# Altium PCB ver1.PcbDoc (part 2 of 2)
Units mil, origin at the board's own origin, x right, y up, seen from the top; angles counter-clockwise.
Board outline 3990 x 2445 mil, 4 copper layers (Top Layer, Top Inner, Bottom Inner, Bottom Layer), stack 53.912 mil thick; 100 components, 79 nets, 453 pads, 152 vias.
Unrouted connection lines stored in the file: 12.
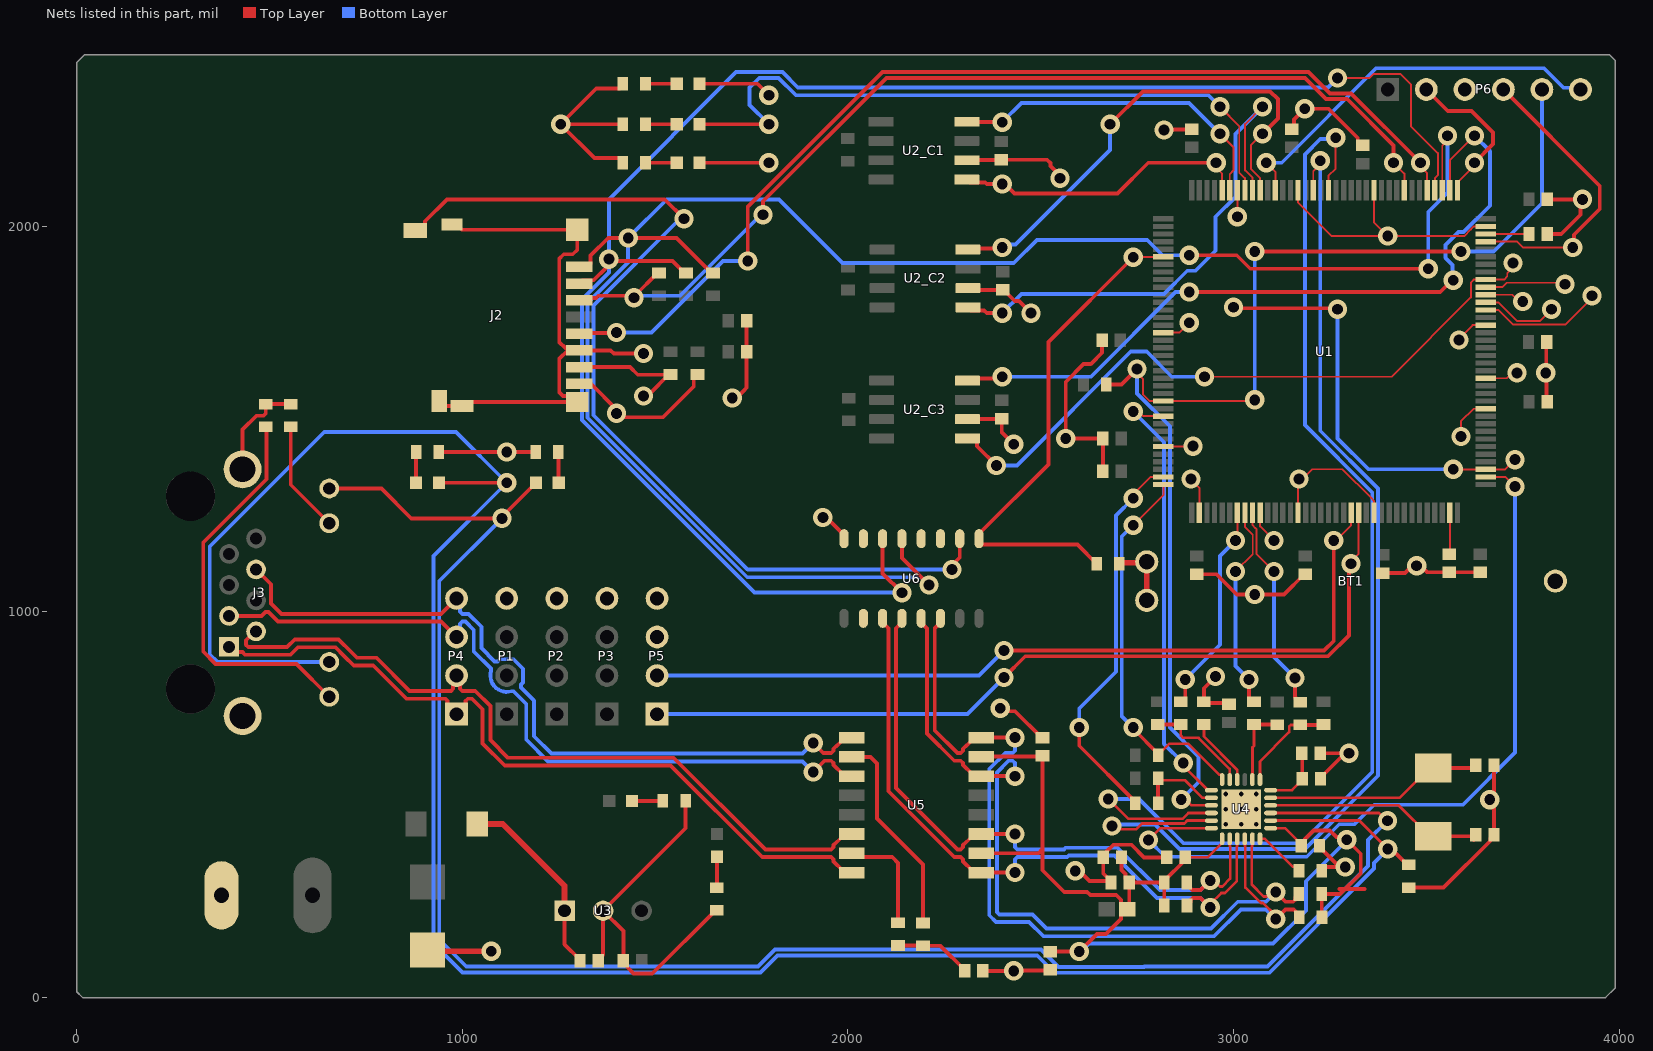
[diagram p4: the nets of this part, all layers, seen from the top]

## Via types
v1: diameter 50, hole 28, Top Layer to Bottom Layer, 143 vias
v2: diameter 23.62, hole 11.81, Top Layer to Bottom Layer, 9 vias

## Nets (pads, with @x,y where several pads share a name; then routed paths per layer and width w, separated by ;. In a path a pad name is that pad's centre, name@x,y a point inside that pad or via, vN(x,y) a via of type N, cw(c..) or ccw(c..) an arc to the next point about the centre after c; other vN are vias at no path point) (continued)
GND: BT1.2 C1.2 C2.2 C3.2 C4.2 C5.2 C6.2 C7.2 C8.2 C9.2 C10.2 C11.2 C12.2 C13.2 C14.2 C15.2 C16_C1.2 C16_C2.2 C16_C3.2 C17.2 C19.2 C20.2 C21.2 C22.2 C23.2 C24.2 C25.2 C30.2 C31.2 C32.2 C33.2 C34.2 C35.2 C36.2 C37.2 CR1.2 J1.2 J2.6 J2.10 J2.11 J2.12 J2.13 J2.14 J3.S1 J3.S2 P1.4 P2.4 P3.4 P6.3 R1.1 R2.1 R3.1 R4.1 R5.1 R6.1 R7.1 R21.2 R24.2 R31.2 R33.1 R34.1 U1.16 U1.31 U1.38 U1.51 U1.61 U1.83 U1.94 U1.107 U1.120 U1.130 U1.138 U2_C1.2 U2_C2.2 U2_C3.2 U3.2 U4.25 U6.8 | length 9668.8
  Top Layer w5: U1.31@2818.07,1428.94 2893.94,1428.94 v1(2895,1430) ; U1.16@2818.07,1724.21 2859.21,1724.21 v1(2885,1750) ; v1(2890,1345) 2890,1343.28 2911.57,1321.7 U1.38@2911.57,1256.69 ; v1(3010,2025) U1.138@3010,2093.31 ; U1.51@3167.48,1256.69 3167.48,1342.48 v1(3170,1345) 3179.28,1345 3204.28,1370 3282.48,1370 3356.71,1295.77 3364.33,1288.15 U1.61@3364.33,1256.69 ; U1.130@3167.48,2093.31 3167.78,2093.01 3167.78,2061.55 3254.33,1975 v1(3400,1975) ; U1.120@3364.33,2093.31 3364.33,2010.67 v1(3400,1975) ; v1(3585,1705) 3585,1708.88 3620.01,1743.9 U1.94@3654.69,1743.9 ; v1(3590,1455) 3590,1494.13 3622.93,1527.07 3654.39,1527.07 U1.83@3654.69,1527.36 ; U1.107@3654.69,1999.8 3623.23,1999.8 3615.61,1992.19 3615.61,1992.01 3598.6,1975 v1(3400,1975)
  Top Layer w7: C20.2@3223.15,390.47 C20.2@3223.15,393.42 ; R24.2@3229.06,328.42 R24.2@3239.06,338.42 ; v1@3280.67,338.42 v1(3290,338.42)
  Top Layer w10: J3.S1@430.04,1369.88 430.04,1472.75 466.07,1508.78 484.14,1508.78 490,1514.64 R33.1@490,1539.06 R34.1@555,1539.06 R34.1@558.94,1539.06 ; CR1.2@910,122.83 CR1.2@912.83,120 ; R7.1@939.06,1415 v1(1115,1415) R6.1@1190,1415 ; J2.10@939.88,1547.36 939.88,1546.75 952.07,1534.57 J2.12@998.94,1534.57 1012.72,1534.57 1022.56,1544.41 J2.13@1277.34,1544.41 ; J2.11@973.35,2005.04 985.16,2005.04 998.94,1991.26 J2.14@1298.15,1991.26 1298.15,1939.23 1286.45,1927.53 1262.82,1927.53 1251.12,1915.83 1251.12,1700.55 1267.12,1684.55 J2.6@1276.12,1684.55 ; J2.13@1298.15,1544.41 J2.13@1277.34,1544.41 ; C17.2@1352.24,95 1352.24,97.95 1365,110.71 U3.2@1365,225 ; R5.1@1415.94,2165 1415.94,2168.94 1407.17,2177.72 1342.28,2177.72 v1(1255,2265) ; R4.1@1415.94,2265 v1(1255,2265) ; R3.1@1415.94,2370 1415.94,2366.06 1407.17,2357.28 1347.28,2357.28 v1(1255,2265) ; v1(1470,1670) 1392.92,1670 1384.65,1678.27 J2.6@1303.07,1678.27 1273.4,1678.27 1251.12,1655.99 1251.12,1570.63 1261.37,1560.37 1276.12,1560.37 1277.34,1559.16 J2.13@1277.34,1544.41 ; R1.1@1579.06,510 1579.06,439.06 U3.2@1365,225 ; R2.1@1656.06,225.94 1492.4,62.28 1444.02,62.28 1427.52,78.79 1427.52,85.24 C19.2@1417.76,95 1417.76,172.24 U3.2@1365,225 ; v1(1700,1555) 1710.82,1555 1730.15,1574.32 1737.24,1581.4 C36.2@1737.24,1675 C37.2@1737.24,1755 ; v1(1935,1245) 1944.11,1245 1990,1199.11 U6.8@1990,1190 ; U2_C1.2@2309.72,2171.34 2310.41,2172.03 2396.59,2172.03 C16_C1.2@2397.28,2172.72 2516.46,2172.72 2525.27,2163.91 2525.27,2156.84 2550,2132.1 v1(2550,2125) ; U2_C3.2@2310,1500 2310.69,1500.69 2398.09,1500.69 C16_C3.2@2398.78,1501.38 2398.78,1466.22 v1(2430,1435) ; U2_C2.2@2315,1835 2401.02,1835 C16_C2.2@2401.28,1835.26 2404.23,1835.26 2432.71,1806.78 2443.22,1806.78 v1(2475,1775) ; C33.2@2349.84,69.06 v1(2429.84,69.06) 2431.22,70.43 2523.46,70.43 C22.2@2524.84,71.81 ; v1(2395,750) 2402.65,742.35 2433.6,742.35 2501.89,674.06 C25.2@2504.84,674.06 ; v1(2589.53,328.42) 2600.36,328.42 2626.34,302.44 2678.27,302.44 C24.2@2682.29,298.42 ; C11.2@2656.38,1360 C11.2@2661.38,1365 C2.2@2661.38,1450 v1(2565,1450) 2565,1596.76 2611.34,1643.11 2629.96,1643.11 2659.13,1672.28 C1.2@2659.13,1705 C1.2@2659.13,1707.95 ; C24.2@2672.52,311.14 2662.29,321.37 C23.2@2662.29,363.42 2672.05,373.19 2672.05,379.64 2688.55,396.14 2735.25,396.14 2767.96,363.42 C21.2@2827.29,363.42 ; v1(2820,2250) 2821.12,2251.12 2890.26,2251.12 C10.2@2891.38,2252.24 ; C3.2@2905,1097.76 2955.68,1097.76 2976.51,1076.92 3008.43,1045 3130.67,1045 3183.43,1097.76 C4.2@3186.38,1097.76 ; v1(2953.27,832.5) 2953.27,831.97 2923.27,801.97 R21.2@2923.27,766.97 2926.46,763.78 2985.08,763.78 C30.2@2988.27,760.59 ; C9.2@3151.38,2252.24 3156.72,2257.58 3156.72,2276.72 v1(3185,2305) 3246.57,2305 3322.28,2229.29 3322.28,2219.76 3332.05,2210 C13.2@3335,2210 ; C20.2@3223.15,390.47 v1@3275.2,338.42 ; C31.2@3224.53,633.42 v1@3289.02,633.42 ; C32.2@3225.52,566.97 3225.52,569.92 v1@3289.02,633.42 ; R24.2@3239.06,338.42 v1@3275.2,338.42 ; 3275,281.42 3340.16,281.42 ; v1@3280.2,333.42 v1@3275.2,338.42 ; v1@3280.67,338.42 v1@3275.2,338.42 ; v1(3299.53,633.42) v1@3289.02,633.42 ; C5.2@3387.01,1100.75 3444.92,1100.75 3464.18,1120 3485.82,1120 3503.07,1102.76 C14.2@3560,1102.76 C6.2@3640,1102.76 C6.2@3639.94,1102.69 ; R31.2@3455,285 3545,285 3665.75,405.75 3665.75,412.2 C35.2@3675.52,421.97 3675.27,422.21 3675.27,491.86 3664.76,502.37 v1(3664.76,513.19) ; v1@3664.53,513.42 3664.53,524.25 3675.52,535.23 C34.2@3675.52,601.97 ; C12.2@3812.24,1700 3811.12,1698.88 3811.12,1621.12 v1(3810,1620) 3811.81,1618.19 3811.81,1546.81 C7.2@3813.62,1545 ; C15.2@3813.62,1980 3850,1980 3900,2030 3900,2065 v1(3905,2070) C8.2@3813.62,2070
  Top Layer w15: CR1.2@912.83,120 v1(1075,120)
  other v1: 3055,1045 3475,1120
  other v2: 2980.16,449.05 3019.53,449.05 3058.9,449.05 2980.16,488.42 3019.53,488.42 3058.9,488.42 2980.16,527.79 3019.53,527.79 3058.9,527.79
NetBT1_1: BT1.1 R8.2 | length 173
  Top Layer w15: R8.2@2704.06,1125 2706.56,1127.5 2772.5,1127.5 BT1.1@2775,1130 BT1.1@2775,1030
NetC14_1: C14.1 U1.71 | length 113.2
  Top Layer w5: U1.71@3561.18,1256.69 3561.18,1143.82 C14.1@3561.38,1143.62
NetC15_1: C15.1 U1.106 | length 111.7
  Top Layer w5: U1.106@3654.69,1980.12 3654.8,1980 C15.1@3766.38,1980
NetC17_1: C17.1 D8.1 U3.1 | length 504.2
  Top Layer w10: U3.1@1265,225 1265,137.95 C17.1@1305,97.95
  Top Layer w15: D8.1@1038.66,450 1105,450 1265,290 U3.1@1265,225 ; C17.1@1305,95 C17.1@1305,97.95
NetC20_1: C20.1 C21.1 C22.1 C23.1 C24.1 C25.1 FB1.2 R27.1 R28.1 R29.1 R30.1 U4.1 U4.19 U5.2 U5.7 | length 3078.4
  Top Layer w7: C21.1@2874.53,363.42 2932.92,363.42 2970.32,400.82 U4.19@2970.32,411.65 ; U4.1@3096.3,439.21 3133.07,439.21 3175.91,396.37 C20.1@3175.91,393.42
  Top Layer w10: U5.2@2328.27,374.06 U5.2@2346.18,374.06 2494.06,374.06 2504.84,384.84 ; U5.7@2328.27,624.06 U5.7@2346.18,624.06 2347.56,625.43 2503.46,625.43 C25.1@2504.84,626.81 2504.84,384.84 ; C22.1@2524.84,119.06 v1(2599.84,119.06) 2645.81,165.03 2669.75,165.03 2708.07,203.35 2708.07,214.56 FB1.2@2721.93,228.42 ; C23.1@2709.53,363.42 2709.53,330.71 2719.77,320.47 2719.77,308.19 C24.1@2729.53,298.42 ; R27.1@2820.48,238.42 2820.24,238.66 R28.1@2820.24,302.6 ; C21.1@2874.53,363.42 2864.77,353.66 2864.77,346.77 2829.14,311.14 2828.78,311.14 R28.1@2820.24,302.6 ; C20.1@3175.91,396.37 3175.91,401.46 3180.99,401.46 3185.67,406.14 3185.67,411.22 3207.87,433.42 3249.53,433.42 3266.88,416.08 3286.88,416.08 3294.53,408.42 3330,372.95 3330,321.85 3276.57,268.42 R29.1@3228.59,268.42 3229.06,267.95 3229.06,208.89 R30.1@3229.53,208.42 ; 2504.84,384.84 2505,384.68 2505,330 2560.94,274.06 2620.47,274.06 2628.82,265.71 2695.86,265.71 2708.07,253.5 2708.07,242.28 FB1.2@2721.93,228.42 ; FB1.2@2721.93,228.42 FB1.2@2724.53,228.42 2729.53,233.42 C24.1@2729.53,298.42 ; C24.1@2729.53,298.42 R28.1@2820,298.42 2820,302.36 R28.1@2820.24,302.6
  Bottom Layer w10: v1(2599.84,119.06) 2604.75,119.06 2625.7,140 3102.68,140 3187.65,224.97 3187.65,301.54 3293.75,407.64 v1(3293.75,409.21)
NetC31_1: C31.1 C32.1 U4.6 | length 162.3
  Top Layer w7: U4.6@3096.3,537.63 3151.89,537.63 3178.27,564.01 C32.1@3178.27,566.97
  Top Layer w10: C32.1@3178.27,566.97 C31.1@3178.27,633.42
NetC33_1: C33.1 R25.2 R26.2 | length 201.8
  Top Layer w10: R26.2@2129.84,135 2130.31,134.53 2194.37,134.53 R25.2@2194.84,134.06 2240.55,134.06 2302.6,72.01 C33.1@2302.6,69.06
NetC34_1: C34.1 U4.5 X1.1 | length 564.7
  Top Layer w7: U4.5@3096.3,517.95 3430.83,517.95 3508.43,595.55 X1.1@3518.27,595.55 ; C34.1@3626.85,595.55 C34.1@3628.27,596.97
  Top Layer w10: X1.1@3518.27,595.55 C34.1@3626.85,595.55
NetC35_1: C35.1 U4.4 X1.2 | length 574.7
  Top Layer w7: U4.4@3096.3,498.26 3428.55,498.26 3508.43,418.38 X1.2@3518.27,418.38 ; C35.1@3616.85,413.38 C35.1@3623.27,406.97 ; C35.1@3626.85,418.38 C35.1@3628.27,416.97
  Top Layer w10: X1.2@3518.27,418.38 C35.1@3626.85,418.38
NetD1_1: D1.1 R1.2 | length 80
  Top Layer w10: D1.1@1440,510 R1.2@1520,510
NetD2_1: D2.1 R2.2 | length 80
  Top Layer w10: R2.2@1660,285 D2.1@1660,365
NetD3_1: D3.1 R3.2 | length 80.9
  Top Layer w10: R3.2@1475,2370 D3.1@1555.94,2370
NetD3_2: D3.2 U1.46 | length 279
  Top Layer w5: U1.46@3069.06,1256.69 3069.06,1221.76 3105,1185.81 v1(3105,1185)
  Top Layer w10: D3.2@1615,2370 1765,2370 v1(1795,2340)
NetD4_1: D4.1 R4.2 | length 80.9
  Top Layer w10: R4.2@1475,2265 D4.1@1555.94,2265
NetD4_2: D4.2 U1.137 | length 1800.6
  Top Layer w5: v1(2965,2310) 3015,2260 3015,2139.45 3029.39,2125.06 3029.39,2093.6 U1.137@3029.69,2093.31
  Top Layer w10: D4.2@1615,2265 v1(1795,2265)
  Bottom Layer w10: v1(1795,2265) 1745,2315 1745,2360 1770,2385 1820,2385 1865,2340 2935,2340 v1(2965,2310)
NetD5_1: D5.1 R5.2 | length 80.9
  Top Layer w10: R5.2@1475,2165 D5.1@1555.94,2165
NetD5_2: D5.2 U1.75 | length 1301.4
  Top Layer w5: v1@3570,1369.88 U1.75@3654.69,1369.88 3704.88,1369.88 v1(3730,1395)
  Top Layer w10: D5.2@1615,2165 v1(1795,2165) ; v1(3000,1790) 3002.5,1787.5 3267.5,1787.5 v1(3270,1785)
  Bottom Layer w10: v1(3270,1785) 3270,1450 3350,1370 v1(3570,1370) ; v1@3719.18,1395 v1(3730,1395)
NetD6_1: D6.1 R6.2 | length 80.4
  Top Layer w10: R6.2@1249.06,1415 1249.06,1335.94 D6.1@1250,1335
NetD6_2: D6.2 J3.9 U4.3 | length 4802.2
  Top Layer w7: U4.3@3096.3,478.58 3376.91,478.58 3397.07,458.42 v1(3399.53,458.42)
  Top Layer w10: J3.9@654.84,1320.08 789.92,1320.08 867.34,1242.66 v1(1102.66,1242.66) 1102.66,1246.71 D6.2@1190.94,1335
  Bottom Layer w10: v1(1102.66,1242.66) 940,1080 940,150 1010,80 1767.11,80 1811.16,124.06 2500.94,124.06 2545.94,79.06 2768.66,79.06 2769.61,80 3088.15,80 3349.23,341.07 3349.23,408.12 v1(3399.53,458.42)
NetD7_1: D7.1 R7.2 | length 80
  Top Layer w10: D7.1@880,1335 R7.2@880,1415
NetD7_2: D7.2 J3.11 R31.1 U4.2 | length 6088.2
  Top Layer w7: U4.2@3096.3,458.89 3326.11,458.89 v1(3400,385)
  Top Layer w10: D7.2@939.06,1335 v1(1115,1335) ; v1(3400,385) 3409.96,385 3447.34,347.62 R31.1@3462.34,347.62
  Bottom Layer w10: J3.11@654.84,870.08 364.98,870.08 345,890.06 345,1170 641.89,1466.89 983.11,1466.89 v1@1112.5,1337.5 ; v1(1115,1335) 925,1145 925,140 1000,65 1773.32,65 1817.38,109.06 2490.94,109.06 2535.94,64.06 3093.42,64.06 3364.23,334.86 3364.23,349.22 v1(3400,385)
NetJ2_3: J2.3 R9.1 U1.116 U6.10 | length 2662.6
  Top Layer w5: v1(3415,2165) 3443.07,2136.93 U1.116@3443.07,2093.31
  Top Layer w10: J2.3@1303.07,1808.19 1309.35,1814.47 1346.97,1814.47 1352.5,1820 1440,1820 v1(1445,1815) ; v1@1445,1820 1447.01,1820 1506.06,1879.06 R9.1@1510,1879.06 ; v1@1780,2039.72 1780,2065 2100,2385 3185,2385 3240,2330 3295,2330 3415,2210 v1(3415,2165)
  Bottom Layer w10: v1(1445,1815) 1450,1820 1564.72,1820 1774.72,2030 v1(1780,2030) ; v1@3408.43,2165 v1(3415,2165)
NetJ2_5: J2.5 U1.113 U6.7 | length 2721.1
  Top Layer w5: v1(3485,2165) 3485,2154.38 3502.13,2137.26 U1.113@3502.13,2093.31
  Top Layer w10: J2.5@1303.07,1721.57 1304.78,1723.29 1398.29,1723.29 v1(1400,1725) ; v1(1740,1910) 1740,2050 2090,2400 3195,2400 3250,2345 3305,2345 v1(3485,2165)
  Bottom Layer w10: v1(1400,1725) 1490.93,1725 1675.93,1910 v1(1740,1910)
NetJ2_9: J2.9 U1.87 U6.2 | length 2639.9
  Top Layer w5: U1.87@3654.69,1606.1 3708.52,1606.1 3713.81,1611.39 3726.39,1611.39 v1(3735,1620)
  Top Layer w10: J2.9@877.87,1989.29 888.7,1989.29 903.39,2003.98 903.39,2013.18 960.21,2070 1525,2070 v1(1575,2020) ; v1(2270,1110) 2270,1120.82 2290,1140.82 U6.2@2290,1190
  Bottom Layer w10: v1(1575,2020) 1565,2020 1340,1795 1340,1510 1740,1110 v1(2270,1110)
NetJ3_10: J3.10 R34.2 | length 291.4
  Top Layer w10: R34.2@555,1480 555,1329.76 J3.10@654.84,1229.92
NetJ3_12: J3.12 R33.2 | length 1027.2
  Top Layer w10: R33.2@490,1480 492.13,1477.87 492.13,1344.16 327.96,1180 327.96,897.04 360,865 569.76,865 J3.12@654.84,779.92
NetP5_1: P5.1 U1.59 | length 2206.9
  Top Layer w5: v1(3305,1125) 3305,1131.63 3324.67,1151.3 3324.67,1256.4 U1.59@3324.96,1256.69
  Top Layer w10: v1(2405,830) 2460,885 3245,885 3299.22,939.22 3299.22,1119.22 v1(3305,1125)
  Bottom Layer w10: P5.1@1505,735 2310,735 v1(2405,830)
NetP5_2: P5.2 U1.58 | length 2145.7
  Top Layer w5: v1(3260,1185) 3265.04,1185 3304.98,1224.94 3304.98,1256.4 U1.58@3305.28,1256.69
  Top Layer w10: v1(2405,900) 3235,900 3260,925 v1(3260,1185)
  Bottom Layer w10: P5.2@1505,835 2340,835 v1(2405,900)
NetP5_3: P5.3 U1.96 | length 325.2
  Top Layer w5: U1.96@3654.69,1783.27 3686.73,1783.27 3725,1745 3860,1745 3930,1815 v1(3930,1820)
NetP5_4: P5.4 U1.97 | length 202.6
  Top Layer w5: U1.97@3654.69,1802.95 3687.05,1802.95 3735,1755 3795,1755 v1(3825,1785)
NetP6_5: P6.5 R32.2 U1.25 U4.15 | length 3237.3
  Top Layer w5: v1(2750,1630) 2750,1619.57 2765,1604.57 2765,1565 2782.95,1547.05 U1.25@2818.07,1547.05 2818.37,1547.34 3052.34,1547.34 v1(3055,1550)
  Top Layer w7: v1@2875.36,513.42 2890.51,498.26 U4.15@2942.76,498.26
  Top Layer w10: R32.2@2670,1590 2710,1590 v1(2750,1630) ; v1(2864.53,513.42) v1@2875.36,513.42 ; v1@3060,1935 v1(3590,1935) ; P6.5@3800,2355 P6.5@3809.39,2345.61
  Bottom Layer w10: v1(2750,1630) 2750,1566.57 2835,1481.57 2835,700 2909.53,625.47 2909.53,558.42 v1(2864.53,513.42) ; v1(3055,1550) v1(3055,1935) ; v1(3590,1935) 3675,1935 3800,2060 P6.5@3800,2355
NetR14_1: R14.1 R18.2 U4.8 | length 204.7
  Top Layer w7: U4.8@3049.06,565.19 3049.06,648.75 3053.27,652.96 R14.1@3053.27,707.91 ; R18.2@3112.8,707.91 R18.2@3113.27,707.44
  Top Layer w10: R14.1@3053.27,707.91 R18.2@3112.8,707.91
NetR14_2: R14.2 U1.44 | length 539.1
  Top Layer w5: v1(3005,1105) 3050,1150 3050,1200 3029.69,1220.31 U1.44@3029.69,1256.69
  Top Layer w10: v1(3040,825) 3040,780.24 3040.55,779.68 3040.55,775.74 3049.33,766.97 R14.2@3053.27,766.97
  Bottom Layer w10: v1(3005,1105) 3005,860 v1(3040,825)
NetR15_1: R15.1 R17.2 U4.7 | length 259.9
  Top Layer w7: U4.7@3068.74,565.19 3068.74,612.32 3144.49,688.07 3144.49,702.86 3148.59,706.97 R15.1@3173.27,706.97 ; R17.2@3232.33,706.97 R17.2@3233.27,707.91
  Top Layer w10: R15.1@3173.27,706.97 R17.2@3232.33,706.97
NetR15_2: R15.2 U1.45 | length 544.3
  Top Layer w5: U1.45@3049.37,1256.69 3049.67,1256.4 3049.67,1224.94 3056.99,1217.62 3057.07,1217.62 3060,1214.69 3060,1150 v1(3105,1105)
  Top Layer w10: v1(3159.53,828.42) 3159.53,779.76 3160.56,778.74 3160.56,774.8 3169.33,766.02 R15.2@3173.27,766.02
  Bottom Layer w10: v1(3105,1105) 3105,882.95 v1(3159.53,828.42)
NetR16_2: R16.2 R19.1 U4.11 | length 278.6
  Top Layer w7: R19.1@2863.27,707.91 2863.27,679.68 2869.53,673.42 2909.53,673.42 2990,592.95 U4.11@2990,565.19
  Top Layer w10: R16.2@2803.27,707.91 R19.1@2863.27,707.91
NetR19_2: R19.2 U1.43 | length 552.2
  Top Layer w5: v1(3005,1185) 3010,1190 U1.43@3010,1256.69
  Top Layer w10: R19.2@2863.27,766.97 2866.22,766.97 2875,775.74 v1(2875,825)
  Bottom Layer w10: v1(2875,825) 2965,915 2965,1145 v1(3005,1185)
NetR20_1: R20.1 U1.35 | length 1016.6
  Top Layer w5: v1(2740,1295) 2740,1305 2785.2,1350.2 U1.35@2818.07,1350.2
  Top Layer w10: v1(2600,700) 2600,652.84 2745.48,507.36 R20.1@2745.48,503.42
  Bottom Layer w10: v1(2600,700) 2600,750 2695,845 2695,1250 v1(2740,1295)
NetR20_2: R20.2 R23.2 U4.14 | length 234.5
  Top Layer w7: R20.2@2804.53,507.36 R20.2@2804.53,503.42 R20.2@2814.06,512.95 ; R23.2@2804.53,563.42 2874.53,563.42 2920,517.95 U4.14@2942.76,517.95 ; R23.2@2804.53,564.48 R23.2@2804.53,568.42
  Top Layer w10: R20.2@2804.53,507.36 R23.2@2804.53,563.42
NetR21_1: R21.1 U4.10 | length 178.5
  Top Layer w7: R21.1@2923.27,707.91 2923.27,676.7 3009.69,590.29 U4.10@3009.69,565.19
NetR22_2: R22.2 U1.36 U4.12 | length 1004.8
  Top Layer w5: v1(2740,1225) 2818.07,1303.07 U1.36@2818.07,1330.51
  Top Layer w7: R22.2@2804.53,628.42 2834.53,658.42 2882.33,658.42 2963.14,577.61 2966.48,577.61 2970.32,573.77 U4.12@2970.32,565.19
  Top Layer w10: v1@2740,696.89 2804.53,632.36 R22.2@2804.53,628.42
  Bottom Layer w10: v1(2740,700) 2710,730 2710,1195 v1(2740,1225)
NetR24_1: R24.1 U4.24 | length 139.6
  Top Layer w7: U4.24@3068.74,411.65 3081.3,411.65 3153.57,339.38 3157.5,339.38 3169.53,327.35 R24.1@3169.53,323.42
NetR25_1: R25.1 U5.10 | length 535.4
  Top Layer w10: U5.10@2010.36,624.06 2058.23,624.06 2075,607.29 2075,464.51 2194.84,344.67 R25.1@2194.84,193.11
NetR26_1: R26.1 U5.15 | length 284.8
  Top Layer w10: U5.15@2010.36,374.06 2020.32,364.09 2114.8,364.09 2129.84,349.06 R26.1@2129.84,194.06
NetU1_27: U1.27 U4.13 | length 1155.1
  Top Layer w5: v1(2740,1520) 2748.61,1511.39 2761.72,1511.39 2765.43,1507.68 U1.27@2818.07,1507.68
  Top Layer w7: v1(2869.53,608.42) 2869.53,601.34 2933.23,537.63 U4.13@2942.76,537.63
  Bottom Layer w10: v1(2740,1520) 2820,1440 2820,657.95 v1(2869.53,608.42)
NetU1_74: U1.74 U4.18 | length 2032
  Top Layer w5: U1.74@3654.69,1350.2 3704.8,1350.2 v1(3730,1325)
  Top Layer w7: v1(2779.53,408.42) 2810.32,439.21 U4.18@2942.76,439.21
  Bottom Layer w10: v1(2779.53,408.42) 2822.95,365 3190,365 3274.21,449.21 3314.21,449.21 3365,500 3595,500 3730,635 v1(3730,1325)
NetU1_100: U1.100 U2_C3.1 | length 1757
  Top Layer w5: v1(2925,1610) 3410,1610 3615.61,1815.61 3615.61,1854.39 3622.93,1861.71 3654.39,1861.71 U1.100@3654.69,1862.01 3702.01,1862.01 3710,1870 3710,1877.82 3725,1892.82 v1(3725,1905)
  Top Layer w10: U2_C3.1@2310,1450 2327.39,1450 2335.18,1442.2 2335.18,1429.82 v1(2385,1380)
  Bottom Layer w10: v1(2385,1380) 2438.43,1380 2733.43,1675 2775,1675 2840,1610 v1(2925,1610)
NetU1_110: U1.110 U2_C3.4 | length 1991
  Top Layer w5: U1.110@3561.18,2093.31 3561.18,2171.18 v1(3625,2235)
  Top Layer w10: U2_C3.4@2310,1600 2315,1605 2395,1605 v1(2400,1610) ; v1(2885,1830) 3536.36,1830 3566.36,1860 v1(3570,1860)
  Bottom Layer w10: v1(2400,1610) 2630,1610 2850,1830 v1(2885,1830) ; v1(3570,1860) 3568.43,1861.57 3568.43,1900 3550,1918.43 3550,1951.57 3583.43,1985 3596.57,1985 3665,2053.43 3665,2195 v1(3625,2235)
NetU1_126: U1.126 U4.16 | length 3021.2
  Top Layer w5: U1.126@3246.22,2093.31 3246.22,2131.22 3265,2150 v1(3265,2230)
  Top Layer w7: v1(2675,515) 2675.59,515 2727.16,463.42 2867.56,463.42 2882.72,478.58 U4.16@2942.76,478.58
  Bottom Layer w10: v1(2675,515) 2755,515 2870,400 3175,400 3360,585 3360,1310 3185,1485 3185,2186.57 3225,2226.57 3261.57,2226.57 v1(3265,2230)
NetU1_128: U1.128 U4.17 | length 2808.1
  Top Layer w5: U1.128@3206.85,2093.31 3206.85,2143.28 3225,2161.43 v1(3225,2170)
  Top Layer w7: v1(2685,445) 2693.23,436.77 2747.88,436.77 2762.53,451.42 2872.53,451.42 2880.01,458.89 U4.17@2942.76,458.89
  Bottom Layer w10: v1(2685,445) 2688.42,448.42 2796.1,448.42 2859.52,385 3185,385 3375,575 3375,1320 3225,1470 v1(3225,2170)
NetU1_135: U1.135 U2_C2.4 | length 1296.5
  Top Layer w5: U1.135@3069.06,2093.31 3068.76,2093.6 3068.76,2125.06 3045,2148.82 3045,2210 v1(3075,2240)
  Top Layer w10: U2_C2.4@2311.22,1940 2313.72,1942.5 2397.5,1942.5 v1(2400,1945) ; v1(2680,2265) 2765,2350 3095,2350 3115,2330 3115,2280 v1(3075,2240)
  Bottom Layer w10: v1(2400,1945) 2407.65,1952.65 2434.22,1952.65 2680,2198.43 v1(2680,2265)
NetU1_136: U1.136 U2_C2.1 | length 1382.3
  Top Layer w5: U1.136@3049.37,2093.31 3049.37,2125.63 3030,2145 3030,2265 v1(3075,2310)
  Top Layer w10: U2_C2.1@2311.22,1790 2319.02,1782.2 2352.8,1782.2 2360,1775 v1(2400,1775)
  Bottom Layer w10: v1(2400,1775) 2450,1825 2820,1825 2880,1885 2901.57,1885 2953.28,1936.72 2953.28,2024.85 3005,2076.57 3005,2240 v1(3075,2310)
NetU1_139: U1.139 U2_C1.4 | length 879.7
  Top Layer w5: v1(2965,2240) 3000,2205 3000,2145 2990.32,2135.32 U1.139@2990.32,2093.31
  Top Layer w10: U2_C1.4@2308.5,2271.34 2312.83,2275.67 2317.83,2270.67 2399.33,2270.67 v1(2400,2270)
  Bottom Layer w10: v1(2400,2270) 2450,2320 2885,2320 v1(2965,2240)
NetU1_140: U1.140 U2_C1.1 | length 772.9
  Top Layer w5: v1(2955,2165) 2963.61,2156.39 2963.61,2143.81 2970.63,2136.79 U1.140@2970.63,2093.31
  Top Layer w10: U2_C1.1@2308.5,2121.34 2315.83,2114.02 2355.98,2114.02 2360,2110 v1(2400,2110) 2406.57,2110 2431.57,2085 2698.8,2085 2778.8,2165 v1(2955,2165)
RX_N: J3.6 P4.4 U5.9 | length 2002.3
  Top Layer w10: J3.6@465.08,1110.24 503.54,1071.77 503.54,1021.96 530.5,995 945,995 P4.4@985,1035 P4.4@993.83,1026.17 ; v1(1910,660) 1935.94,634.06 1956.63,634.06 1962.48,639.91 1962.48,645.23 1971.27,654.02 1972.41,654.02 1992.44,674.06 U5.9@2010.36,674.06
  Bottom Layer w10: P4.4@985,1035 993.83,1026.17 993.83,1000.86 999.69,995 1016.26,995 1049.53,961.73 1049.53,906.02 1083.65,871.9 1091.93,871.9 1097.44,877.4 1132.56,877.4 1157.4,852.56 1157.4,817.44 1151.9,811.93 1151.9,803.65 1158.19,797.35 1185.71,769.83 1185.71,677.57 1230.78,632.5 1882.5,632.5 v1(1910,660)
RX_P: J3.3 P4.3 U5.11 | length 1990.1
  Top Layer w10: J3.3@395,989.76 479.32,989.76 489.24,999.69 497.53,999.69 522.22,975 945,975 P4.3@985,935 P4.3@993.83,943.83 ; v1(1910,585) 1939.06,614.06 1956.63,614.06 1962.48,608.2 1962.48,602.88 1971.27,594.09 1972.41,594.09 1992.44,574.06 U5.11@2010.36,574.06
  Bottom Layer w10: P4.3@985,935 993.83,943.83 993.83,969.14 999.69,975 1007.97,975 1029.53,953.44 1029.53,910.16 1029.53,897.73 ; 1029.56,897.7 1074.42,852.84 1074.42,848.7 1074.42,847.3 ccw(c1115,835) 1127.3,794.42 1128.7,794.42 1132.84,794.42 1149.91,777.35 1165.71,761.55 1165.71,669.29 1222.5,612.5 1882.5,612.5 v1(1910,585)
RX_PHYS_N: R30.2 U4.22 U5.8 U6.14 | length 2180.2
  Top Layer w7: U4.22@3029.37,411.65 3029.65,411.37 3029.65,392.79 3030.72,391.72 3030.72,285.42 3071.09,245.04 3076.51,245.04 3109.53,212.02 v1(3109.53,203.42)
  Top Layer w10: U6.14@2240,983.31 2240,971.59 2225,956.59 2225,693.22 2284.17,634.06 2292.45,634.06 2298.31,639.91 2298.31,645.23 2307.1,654.02 2308.23,654.02 2328.27,674.06 U5.8@2346.18,674.06 v1(2433.27,674.06) ; v1(3109.53,203.42) 3134.53,228.42 3155.84,228.42 3161.7,222.56 3161.7,217.2 R30.2@3170.48,208.42
  Bottom Layer w10: v1(2433.27,674.06) 2433.27,639.91 2427.41,634.06 2408.42,634.06 2366.59,592.23 2366.59,292.52 2366.56,292.49 2366.56,213.2 2384.13,195.62 2469.99,195.62 2506.56,159.06 2950.02,159.06 3019.38,228.42 3084.53,228.42 v1(3109.53,203.42)
RX_PHYS_P: R29.2 U4.23 U5.6 U6.13 | length 2100.4
  Top Layer w7: U4.23@3049.06,411.65 3048.78,411.37 3048.78,392.79 3047.72,391.72 3047.72,292.46 3078.13,262.04 3086.52,262.04 3097.9,273.42 v1(3109.53,273.42)
  Top Layer w10: U6.13@2190,983.31 2190,971.59 2205,956.59 2205,684.94 2275.88,614.06 2292.45,614.06 2298.31,608.2 2298.31,602.88 2307.1,594.09 2308.23,594.09 2328.27,574.06 U5.6@2346.18,574.06 v1(2433.27,574.06) ; v1(3109.53,273.42) 3134.53,248.42 3154.89,248.42 3160.75,254.28 3160.75,259.64 R29.2@3169.53,268.42
  Bottom Layer w10: v1(2433.27,574.06) 2433.27,608.2 2427.41,614.06 2416.7,614.06 2386.59,583.94 2386.59,284.24 2386.56,284.2 2386.56,221.48 2392.41,215.62 2478.27,215.62 2514.84,179.06 2941.73,179.06 3011.1,248.42 3084.53,248.42 v1(3109.53,273.42)
SD_D0: J2.7 R10.1 U1.98 U6.3 | length 437.7
  Top Layer w5: U1.98@3654.69,1822.64 3722.38,1822.64 3740.02,1805 v1(3750,1805)
  Top Layer w10: J2.7@1303.07,1634.96 1435.04,1634.96 1455,1615 R10.1@1535.12,1615 ; v1(1470,1560) 1476.7,1566.7 1486.82,1566.7 R10.1@1535.12,1615 ; R10.1@1540,1615.94 1536.06,1615.94 R10.1@1535.12,1615
  Bottom Layer w10: v1@3750,1803.43 v1(3750,1805)
SD_D1: J2.8 R11.1 U1.99 U6.4 | length 604.4
  Top Layer w5: U1.99@3654.69,1842.32 3697.32,1842.32 3708.77,1853.77 3856.23,1853.77 v1(3860,1850)
  Top Layer w10: J2.8@1303.07,1591.65 1333.35,1591.65 v1@1400,1525 ; v1(1400,1515) 1410,1505 1520,1505 1600,1585 R11.1@1600,1615.94
SD_D2: J2.1 R12.1 U1.111 U6.5 | length 4904.8
  Top Layer w5: U1.111@3541.5,2093.31 3541.5,2208.91 3546.39,2213.81 3546.39,2226.39 v1(3555,2235)
  Top Layer w10: J2.1@1303.07,1894.8 1323.74,1894.8 1332.52,1903.58 1332.52,1924.09 1378.43,1970 v1(1430,1970) 1555.12,1970 1646.06,1879.06 R12.1@1650,1879.06 ; U6.5@2140,1190 2140,1140 v1(2210,1070) ; v1(2885,1925) 3008.43,1925 3043.43,1890 v1(3505,1890)
  Bottom Layer w10: v1(2210,1070) 2190,1090 1738.79,1090 1325,1503.79 1325,1801.21 1430,1906.21 v1(1430,1970) 1530,2070 1821.2,2070 1986.2,1905 2430,1905 2490,1965 2776.3,1965 2816.3,1925 v1(2885,1925) ; v1(3505,1890) 3505,2037.5 3555,2087.5 v1(3555,2235)
SD_D3: J2.2 R13.1 U1.112 U6.6 | length 4666.7
  Top Layer w5: v1(3270,2385) 3353.05,2385 3362.95,2394.9 3433.82,2394.9 3460.1,2368.63 3460.1,2259.9 3530,2190 3530,2132.95 3522.11,2125.06 3522.11,2093.6 U1.112@3521.81,2093.31
  Top Layer w10: J2.2@1303.07,1851.5 1311.85,1860.28 1340.28,1860.28 1372.35,1892.35 1372.35,1907.35 v1(1380,1915) 1384.73,1910.27 1454.74,1910.27 1454.81,1910.33 1544.78,1910.33 1576.06,1879.06 R13.1@1580,1879.06 ; U6.6@2090,1190 2090,1100 v1(2140,1050)
  Bottom Layer w10: v1(2140,1050) 1757.57,1050 1310,1497.57 1310,1810 1380,1880 v1(1380,1915) 1380,2070 1710,2400 1830,2400 1870,2360 3245,2360 3260,2375 v1@3260,2385
SWCLK: P6.2 U1.109 | length 407.9
  Top Layer w5: U1.109@3580.87,2093.31 3580.87,2112.99 3625,2157.13 v1(3625,2165)
  Top Layer w10: P6.2@3500,2355 3555.55,2299.45 3617.12,2299.45 3673.36,2243.21 3673.36,2213.36 v1(3625,2165)
SWDIO: P6.4 U1.105 | length 774.3
  Top Layer w5: U1.105@3654.69,1960.43 3735.79,1960.43 3751.22,1945 v1(3880,1945)
  Top Layer w10: P6.4@3700,2355 3950,2105 3950,2045 3883.28,1978.28 3883.28,1948.28 v1(3880,1945)
SWO: P6.6 U1.133 | length 1020.7
  Top Layer w5: v1(3085,2165) 3108.43,2141.57 U1.133@3108.43,2093.31
  Bottom Layer w10: v1(3085,2165) 3125,2165 3370,2410 3804.96,2410 3855.47,2359.49 3895.51,2359.49 P6.6@3900,2355
TX_N: J3.2 P4.2 U5.14 | length 1988.9
  Top Layer w10: J3.2@465.08,949.61 462.32,949.61 439.14,926.43 439.14,914.72 445,908.86 545.62,908.86 565.3,928.54 679.06,928.54 713.31,894.3 726.51,881.09 777.19,881.09 863.28,795 970.31,795 976.17,800.86 976.17,826.17 P4.2@985,835 993.83,826.17 993.83,800.86 999.69,795 1033.55,795 1072.6,755.95 1072.6,667.4 1118.36,621.64 1548.41,621.64 1785.99,384.06 1956.63,384.06 1962.48,389.91 1962.48,395.23 1971.27,404.02 1972.41,404.02 1992.44,424.06 U5.14@2010.36,424.06
TX_P: J3.1 P4.1 U5.16 | length 1989.2
  Top Layer w10: J3.1@395,909.45 408.61,895.84 429.73,895.84 436.71,888.86 553.9,888.86 573.59,908.54 670.78,908.54 693.31,886.01 718.23,861.09 768.91,861.09 855,775 955.94,775 961.8,769.14 961.8,758.2 P4.1@985,735 1008.2,758.2 1008.2,769.14 1014.06,775 1025.27,775 1052.6,747.67 1052.6,659.12 1110.07,601.64 1540.12,601.64 1777.71,364.06 1956.63,364.06 1962.48,358.2 1962.48,352.88 1971.27,344.09 1972.41,344.09 1992.44,324.06 U5.16@2010.36,324.06 U5.16@2000.4,334.02
TX_PHYS_N: R28.2 U4.20 U5.3 U6.12 | length 1693.7
  Top Layer w7: v1(2939.53,303.42) 2949.51,303.42 2965.13,287.8 2970.93,287.8 2991.35,308.21 2991.35,391.72 2990.28,392.79 2990.28,411.37 U4.20@2990,411.65
  Top Layer w10: U6.12@2140,983.31 2140,972.84 2125,957.84 2125,543.22 2284.17,384.06 2292.45,384.06 2298.31,389.91 2298.31,395.23 2307.1,404.02 2308.23,404.02 2328.27,424.06 U5.3@2346.18,424.06 v1(2433.27,424.06) ; R28.2@2879.06,298.42 2887.84,289.64 2887.84,284.28 2893.7,278.42 2914.53,278.42 v1(2939.53,303.42)
  Bottom Layer w10: v1(2433.27,424.06) 2433.27,389.91 2439.13,384.06 2560.31,384.06 2564.68,388.42 2699.53,388.42 2809.53,278.42 2914.53,278.42 v1(2939.53,303.42)
TX_PHYS_P: R27.2 U4.21 U5.1 U6.11 | length 1768.6
  Top Layer w7: v1(2939.53,233.42) 2939.53,242.02 2968.31,270.8 2977.97,270.8 3008.35,301.17 3008.35,391.72 3009.41,392.79 3009.41,411.37 U4.21@3009.69,411.65
  Top Layer w10: U6.11@2090,983.31 2090,972.84 2105,957.84 2105,534.94 2275.88,364.06 2292.45,364.06 2298.31,358.2 2298.31,352.88 2307.1,344.09 2308.23,344.09 2328.27,324.06 U5.1@2346.18,324.06 v1(2433.27,324.06) ; R27.2@2879.53,238.42 2888.31,247.2 2888.31,252.56 2894.17,258.42 2914.53,258.42 v1(2939.53,233.42)
  Bottom Layer w10: v1(2433.27,324.06) 2433.27,358.2 2439.13,364.06 2568.6,364.06 2572.96,368.42 2691.25,368.42 2801.25,258.42 2914.53,258.42 v1(2939.53,233.42)
Vbat: R8.1 U1.6 U6.1 | length 1311.5
  Top Layer w5: v1(2740,1920) 2741.06,1921.06 U1.6@2818.07,1921.06
  Top Layer w10: R8.1@2645,1125 2595.4,1174.6 2346.29,1174.6 2340,1180.89 2340,1202.8 2520,1382.8 2520,1700 v1(2740,1920)
pads on no net: J3.4 J3.5 J3.7 J3.8 J3.MH1 J3.MH2 U1.1 U1.2 U1.3 U1.4 U1.5 U1.7 U1.8 U1.9 U1.10 U1.11 U1.12 U1.13 U1.14 U1.15 U1.18 U1.19 U1.20 U1.21 U1.22 U1.23 U1.24 U1.26 U1.28 U1.29 U1.34 U1.37 U1.40 U1.41 U1.42 U1.47 U1.48 U1.49 U1.50 U1.53 U1.54 U1.55 U1.56 U1.57 U1.60 U1.63 U1.64 U1.65 U1.66 U1.67 U1.68 U1.69 U1.70 U1.73 U1.76 U1.77 U1.78 U1.79 U1.80 U1.81 U1.82 U1.85 U1.86 U1.88 U1.89 U1.90 U1.91 U1.92 U1.93 U1.101 U1.102 U1.103 U1.104 U1.114 U1.115 U1.117 U1.118 U1.119 U1.122 U1.123 U1.124 U1.125 U1.127 U1.129 U1.132 U1.134 U1.141 U1.142 U2_C1.5 U2_C1.8 U2_C2.5 U2_C2.8 U2_C3.5 U2_C3.8 U5.4 U5.5 U5.12 U5.13

## Polygon pours and split planes (outlines as drawn)
GND on Top Inner (split plane): 3969.9,2421.68 3969.9,33.32 3956.68,20.1 23.32,20.1 20.1,23.32 20.1,2416.68 28.32,2424.9 3966.68,2424.9
3.3V on Bottom Inner (split plane): 3969.9,2421.68 3969.9,33.32 3956.68,20.1 23.32,20.1 20.1,23.32 20.1,2416.68 28.32,2424.9 3966.68,2424.9

## Silkscreen, mask and mechanical layers (free items; w line width, h text height)
Top Overlay:
  text "SUCCESS" at 830,2345 h60
  text "No Mem" at 830,2245 h60
  text "HRDFLT" at 830,2140 h60

## Text inside footprints (layer, text, board x,y; h text height)
C16_C1: Top Assembly "C16_CAN1" at 2388.05,2269.96 h39.37 r270